# Altium PCB Blinking_Light_Pcb.PcbDoc
Units mil, origin at the board's own origin, x right, y up, seen from the top; angles counter-clockwise.
Board outline 1200 x 2430 mil, 2 copper layers (Top Layer, Bottom Layer); 9 components, 6 nets, 51 pads, 0 vias.
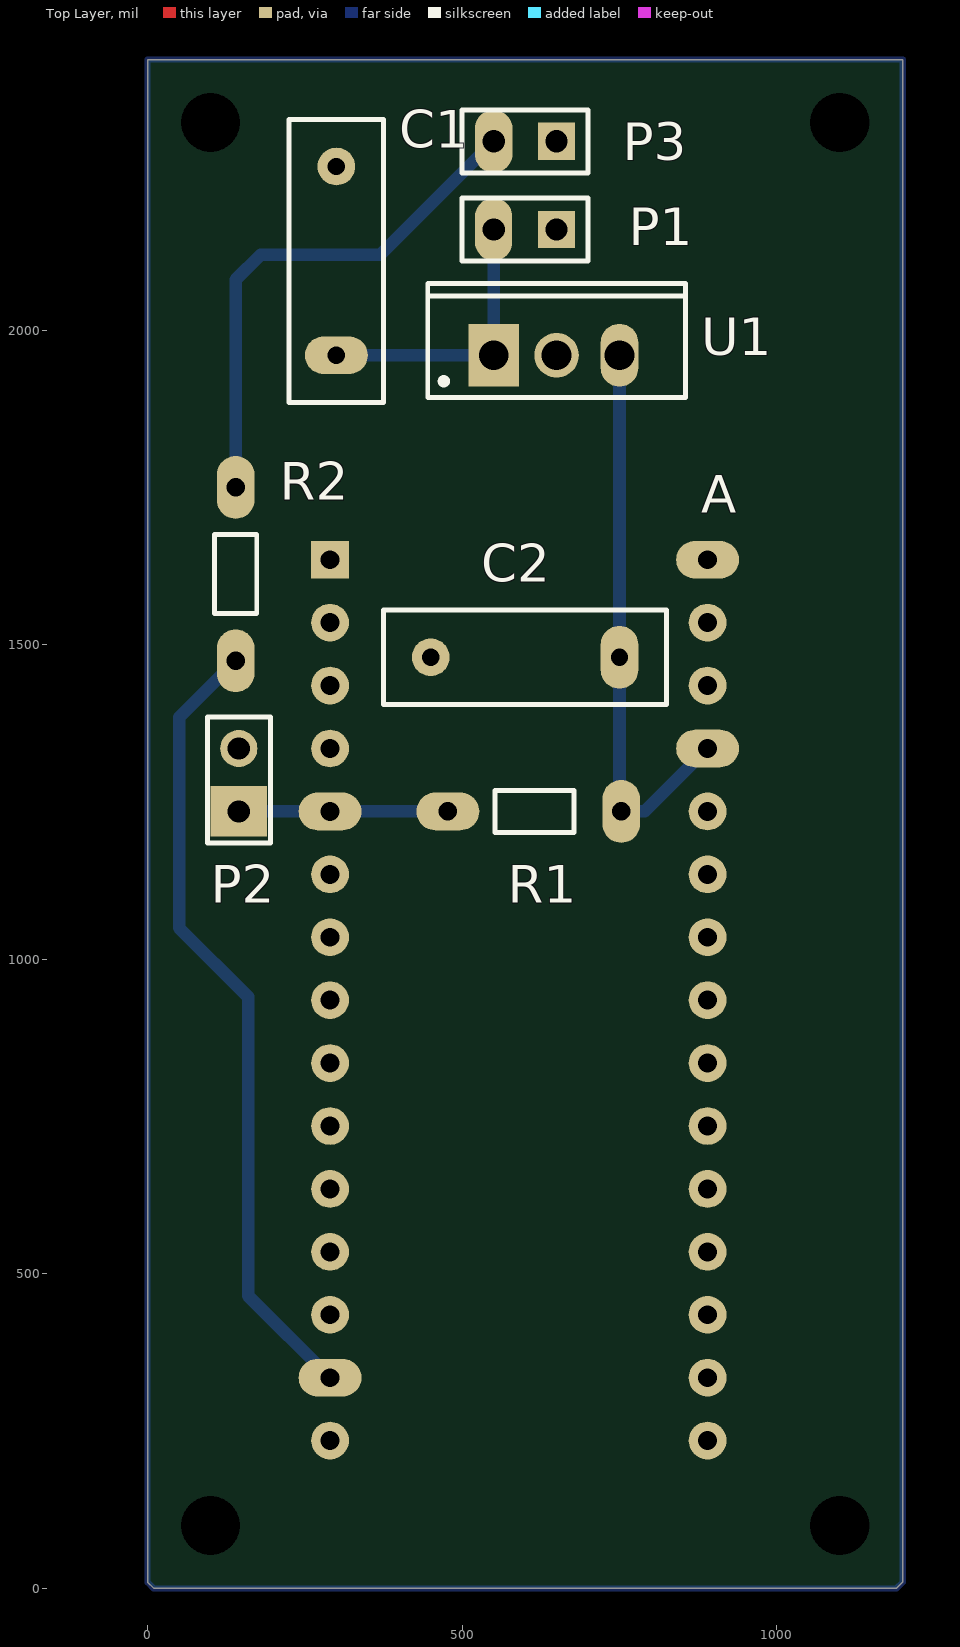
[diagram p0: Top Layer view]
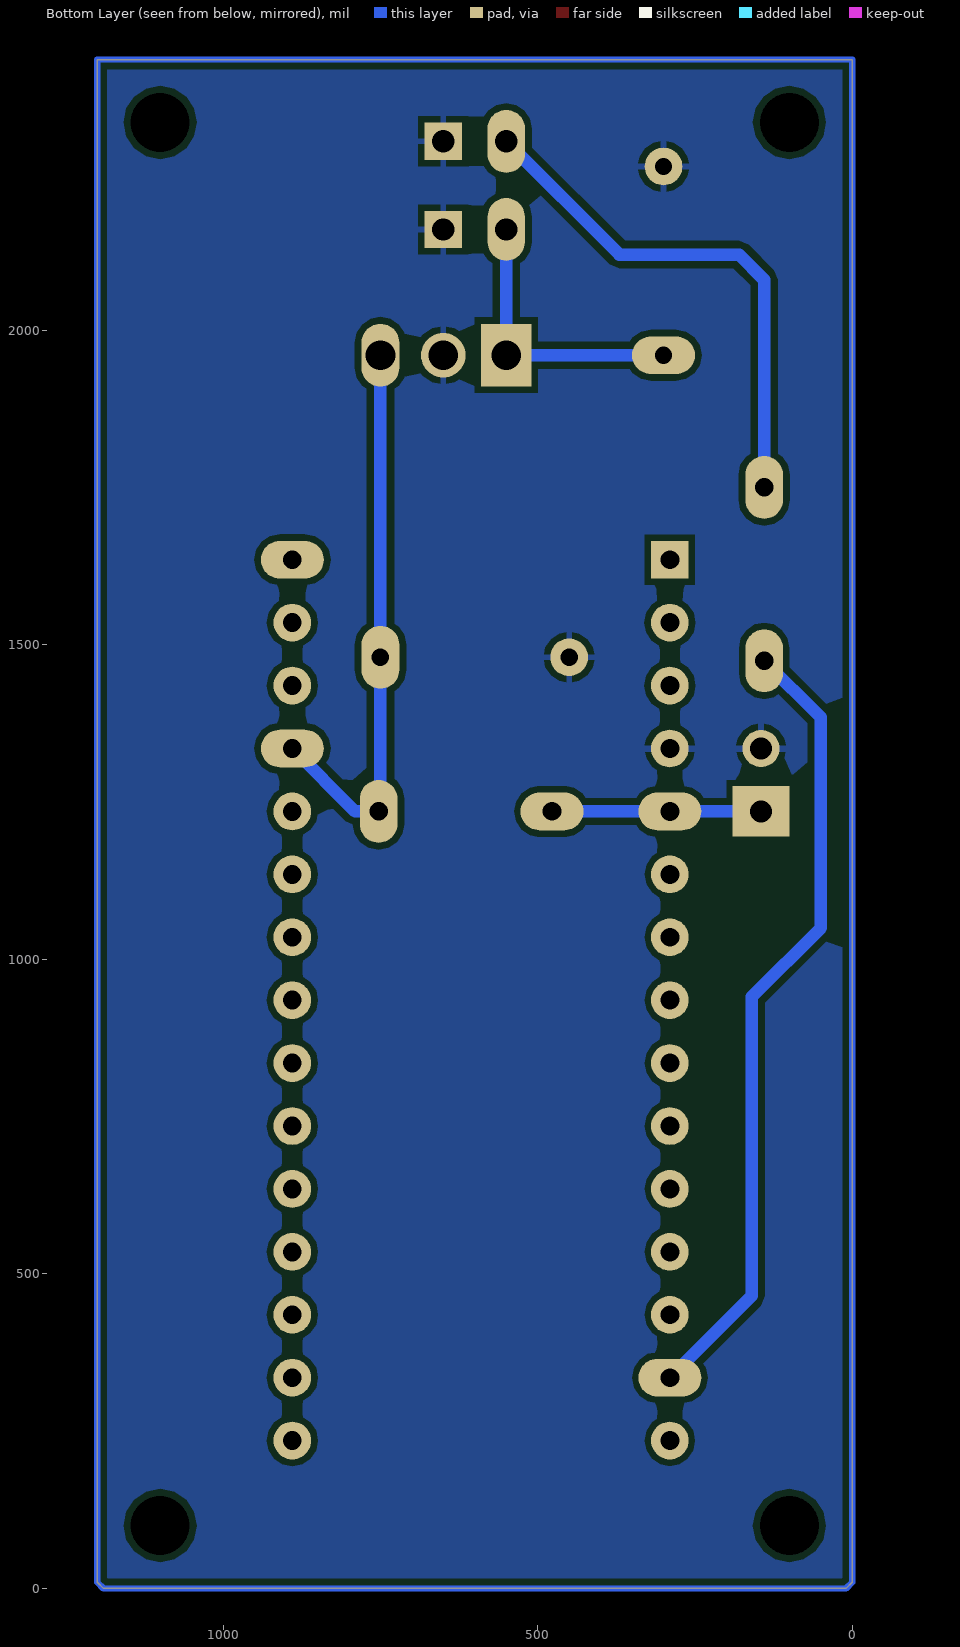
[diagram p1: Bottom Layer view, seen from below]

## Layer stack, top to bottom
Top Solder: solder mask 0.4, Solder Resist, Dk 3.5
Top Layer: signal copper 1.4
Dielectric 1: dielectric 12.6, FR-4, Dk 4.8
Bottom Layer: signal copper 1.4
Bottom Solder: solder mask 0.4, Solder Resist, Dk 3.5

## Board outline
0,10 0,2430 1200,2430 1200,10 1190,0 10,0

## Design rules (kind name [scope] priority, off if disabled: settings)
Clearance Clearance_1 [InNamedPolygon('Bottom Layer-No Net 1')] p1: gap=10 ignorepadtopadclearanceinfootprint=FALSE except(0: Arc-Hole Track-Hole SMDPad-Hole THPad-Hole Via-Hole Fill-Hole Poly-Hole Region-Hole Text-Hole)
Clearance [All] p2: gap=10 ignorepadtopadclearanceinfootprint=FALSE except(0: Arc-Hole Track-Hole SMDPad-Hole THPad-Hole Via-Hole Fill-Hole Poly-Hole Region-Hole Text-Hole)
ComponentClearance [All] p1: gap=0 collisioncheckmode=3 verticalgap=0 showdistances=FALSE
PolygonConnect [All] p1: connectstyle=Relief reliefconductorwidth=10 reliefentries=4 polygonreliefangle="90 Angle" airgapwidth=10
RoomDefinition First_Schematic [InComponentClass('First_Schematic')] p1 off: confinementstyle=ConfineIn formatcopy=TRUE lockcomponents=FALSE outline 1945,-20 4245,-20 4245,1695 1945,1695
RoutingVias [All] p1: holewidth=28 width=50 viastyle="Through Hole" minholewidth=28 minwidth=50 maxholewidth=28 maxwidth=50
SolderMaskExpansion [All] p1: expansion=4
Width [All] p1: maxlimit=20 minlimit=10 preferedwidth=15 minimp=50.000000 maximp=50.000000 favimp=50.000000
29 further rules are at their usual default settings.

## Components (designator, comment, footprint, x,y, rotation, side; value= is the part's Value field where it differs from the comment)
A "arduinoNano" "Arduino nano" 230,1795 r270 top
C1 "Cap" RAD-0.3#1 300,2110 r90 top value=100pF
C2 "Cap" RAD-0.3#2 600,1480 r0 top value=100pF
P1 "9V Battery" HDR1X2#1 650,2160 r180 top
P2 "Button" HDR1X2#2 145,1235 r90 top
P3 "LED" HDR1X2#3 650,2300 r180 top
R1 "15 K" YFDZ-MFJRY13-2_M#1 615,1235 r0 top
R2 "220" YFDZ-MFJRY13-2_M#2 140,1612.2 r270 top
U1 "L7805ABP" TO220FP 650,1960 r0 top

## Footprints (in the part's own frame and the unit in brackets; to place one, negate y for a bottom-side part, rotate by r counter-clockwise, add the part's x,y. Pads: shape width x height; smd on the part's side, far side on the other; paste and mask are expansions set on the pad)
"Arduino nano" [mil] "arduino nano"
  rect 60x60 hole 30: 0(160,60)
  round 60 hole 30: 1(260,60) 2(360,60) 3(460,60) 5(660,60) 6(760,60) 7(860,60) 8(960,60) 9(1060,60) 10(1160,60) 11(1260,60) 12(1360,60) 14(1560,60) 15(1560,660) 16(1460,660) 17(1360,660) 18(1260,660) 19(1160,660) 20(1060,660) 21(960,660) 22(860,660) 23(760,660) 24(660,660) 25(560,660) 27(360,660) 28(260,660)
  oval 60x100 hole 30: 4(560,60) 13(1460,60) 26(460,660) 29(160,660)
HDR1X2#1 [mm] "Connector; Header; 2 Position"
  rect 1.5x1.5 hole 0.9: 1(0,0)
  oval 1.5x2.54 hole 0.9: 2(2.54,0)
  silkscreen extent -1.27,-1.27 3.81,1.27
HDR1X2#2 [mm] "Connector; Header; 2 Position"
  rect 2.032x2.286 hole 0.9: 1(0,0)
  round 1.5 hole 0.9: 2(2.54,0)
  silkscreen extent -1.27,-1.27 3.81,1.27
HDR1X2#3 [mm] "Connector; Header; 2 Position"
  rect 1.5x1.5 hole 0.9: 1(0,0)
  oval 1.524x2.54 hole 0.9: 2(2.54,0)
  silkscreen extent -1.27,-1.27 3.81,1.27
RAD-0.3#1 [mil] "Radial Cap, Thru-Hole; 2 Leads; 0.3 in Pin Spacing"
  oval 60x100 hole 27.56: 1(-150,0)
  round 60 hole 27.56: 2(150,0)
  silkscreen extent -225,-75 225,75
RAD-0.3#2 [mil] "Radial Cap, Thru-Hole; 2 Leads; 0.3 in Pin Spacing"
  round 60 hole 27.56: 1(-150,0)
  oval 60x100 hole 27.56: 2(150,0)
  silkscreen extent -225,-75 225,75
TO220FP [mm] "TO, Thru-Hole, Vertical, Heatsink Mounted; 3 In-Line Leads; Pitch 2.54 mm"
  rect 2.032x2.54 hole 1.2: 1(-2.54,0)
  round 1.8 hole 1.2: 2(0,0)
  oval 1.524x2.54 hole 1.2: 3(2.54,0)
  silkscreen extent -5.2,-1.7 5.2,2.9, body extent -5.25,-1.75 5.25,2.95, height 20
YFDZ-MFJRY13-2_M#1 [mm] "Through Hole Resistor, 2-Leads, Dia 1.7mm, Body Length 3.2mm, Pin Spacing 7mm, IPC Low Density"
  oval 2.54x1.524 hole 0.75: 1(-3.5,0)
  oval 1.524x2.54 hole 0.75: 2(3.5,0)
  silkscreen extent -1.6,-0.85 1.6,0.85, body extent -3.7,-0.85 3.71,0.85, height 1.69
YFDZ-MFJRY13-2_M#2 [mm] "Through Hole Resistor, 2-Leads, Dia 1.7mm, Body Length 3.2mm, Pin Spacing 7mm, IPC Low Density"
  oval 2.54x1.524 hole 0.75: 1(-3.5,0) 2(3.5,0)
  silkscreen extent -1.6,-0.85 1.6,0.85, body extent -3.7,-0.85 3.71,0.85, height 1.69

## Part data
C1 C2: "Capacitor", LatestRevisionDate=17-Jul-2002, LatestRevisionNote="Re-released for DXP Platform.", PackageDescription="Radial Cap, Thru-Hole; 2 Leads; 0.3 in Pin Spacing", PackageReference=RAD-0.3, Published=8-Jun-2000, Publisher="Altium Limited"
P1 P2 P3: library part "Header 2", "Header, 2-Pin", LatestRevisionDate=17-Jul-2002, LatestRevisionNote="Re-released for DXP Platform.", Publisher="Altium Limited"
R1 R2: library part CMP-0923-00002-1, "Metal Film Fixed Resistor, 51 KOhm +/- 5%, -55 to 155 degC, 2-Pin THD, Dia 1.7 mm, Body Length 3.2 mm, RoHS", Insulation Voltage (Max.) (V)=200, Load Voltage (Max.) (V)=300, Manufacturer="YingFa Electronics", Operating Voltage (Max.) (V)=150, PartNumber=MFJRY13T52051K00, Resistance (Ohm)=51000, Temperature Range="-55 to 155 degC", Accuracy="+/- 5%", ComponentLink1Description="Manufacturer URL", ComponentLink1URL=http://www.szyfdz.net/, ComponentLink2Description=Datasheet, ComponentLink2URL=http://www.szyfdz.net/mojinshuyanghuamodianzu/, Mounting Technology="Through Hole", PackageDescription="2-Pin Through Hole Resistor, Dia 1.7 mm, Body Length 3.2 mm", PackageReference=MFJRY13-2, Pulsed Voltage (Max.) (V)=300, RoHS=TRUE
U1: library part CMP-0244-00479-1, "Positive Voltage Regulator, 5V, 3-Pin TO-220FP", ComponentLink1Description="Manufacturer URL", ComponentLink1URL=http://www.st.com, ComponentLink2Description=Datasheet, ComponentLink2URL=http://www.st.com/internet/com/TECHNICAL_RESOURCES/TECHNICAL_LITERATURE/DATASHEET/CD00000444.pdf, DatasheetVersion=16/11/2011, PackageDescription="TO, Thru-Hole, Vertical, Heatsink Mounted; 3 In-Line Leads; Pitch 2.54 mm", PackageReference=TO220FP, PackageVersion=2011

## Free pads (board coordinates)
  round 60 hole 94: 4(100,100) 5(1100,100) 6(100,2330) 7(1100,2330)

## Nets (pads, with @x,y where several pads share a name; then routed paths per layer and width w, separated by ;. In a path a pad name is that pad's centre, name@x,y a point inside that pad or via, vN(x,y) a via of type N, cw(c..) or ccw(c..) an arc to the next point about the centre after c; other vN are vias at no path point)
GND: A.3 C1.2 C2.1 P1.1 P2.2 P3.1 U1.2 | length 7.1
  Bottom Layer w10: P3.1@645,2315 P3.1@650,2320
NetA_4: A.4 P2.1 R1.1 | length 332.2
  Bottom Layer w20: P2.1 A.4 R1.1
NetA_13: A.13 R2.2 | length 1276.1
  Bottom Layer w20: R2.2 50,1384.41 50,1050 160,940 160,465 A.13
NetA_26: A.26 C2.2 R1.2 U1.3 | length 904.8
  Bottom Layer w10: R1.2@750,1237.8 R1.2
  Bottom Layer w20: R1.2@750,1237.8 C2.2 U1.3 ; R1.2 790,1235 A.26
NetC1_1: C1.1 P1.2 U1.1 | length 450
  Bottom Layer w20: C1.1 U1.1 P1.2
NetP3_2: P3.2 R2.1 | length 831.1
  Bottom Layer w20: R2.1 140,2080 180,2120 370,2120 P3.2
pads on no net: A.0 A.1 A.2 A.5 A.6 A.7 A.8 A.9 A.10 A.11 A.12 A.14 A.15 A.16 A.17 A.18 A.19 A.20 A.21 A.22 A.23 A.24 A.25 A.27 A.28 A.29
copper on no net: | length 7248.3
  Bottom Layer w10: 0,10 0,2430 1200,2430 1200,10 1190,0 10,0 0,10

## Polygon pours and split planes (outlines as drawn)
GND on Bottom Layer "Bottom Layer-No Net 1" (solid, remove dead copper, pour order 14): -2.81,2422.68 7.19,2432.68 1197.19,2432.68 1197.19,12.68 1187.19,2.68 7.19,2.68 -2.81,12.68

## Other copper
Bottom Layer:
  pour cut-out: 1225,2395
  pour cut-out: -105,2395